# Altium PCB Top_PCB.PcbDoc
Units mm, origin at the board's own origin, x right, y up, seen from the top; angles counter-clockwise.
Board outline 56 x 85 mm, 2 copper layers (Top Layer, Bottom Layer); 33 components, 48 nets, 119 pads, 13 vias.
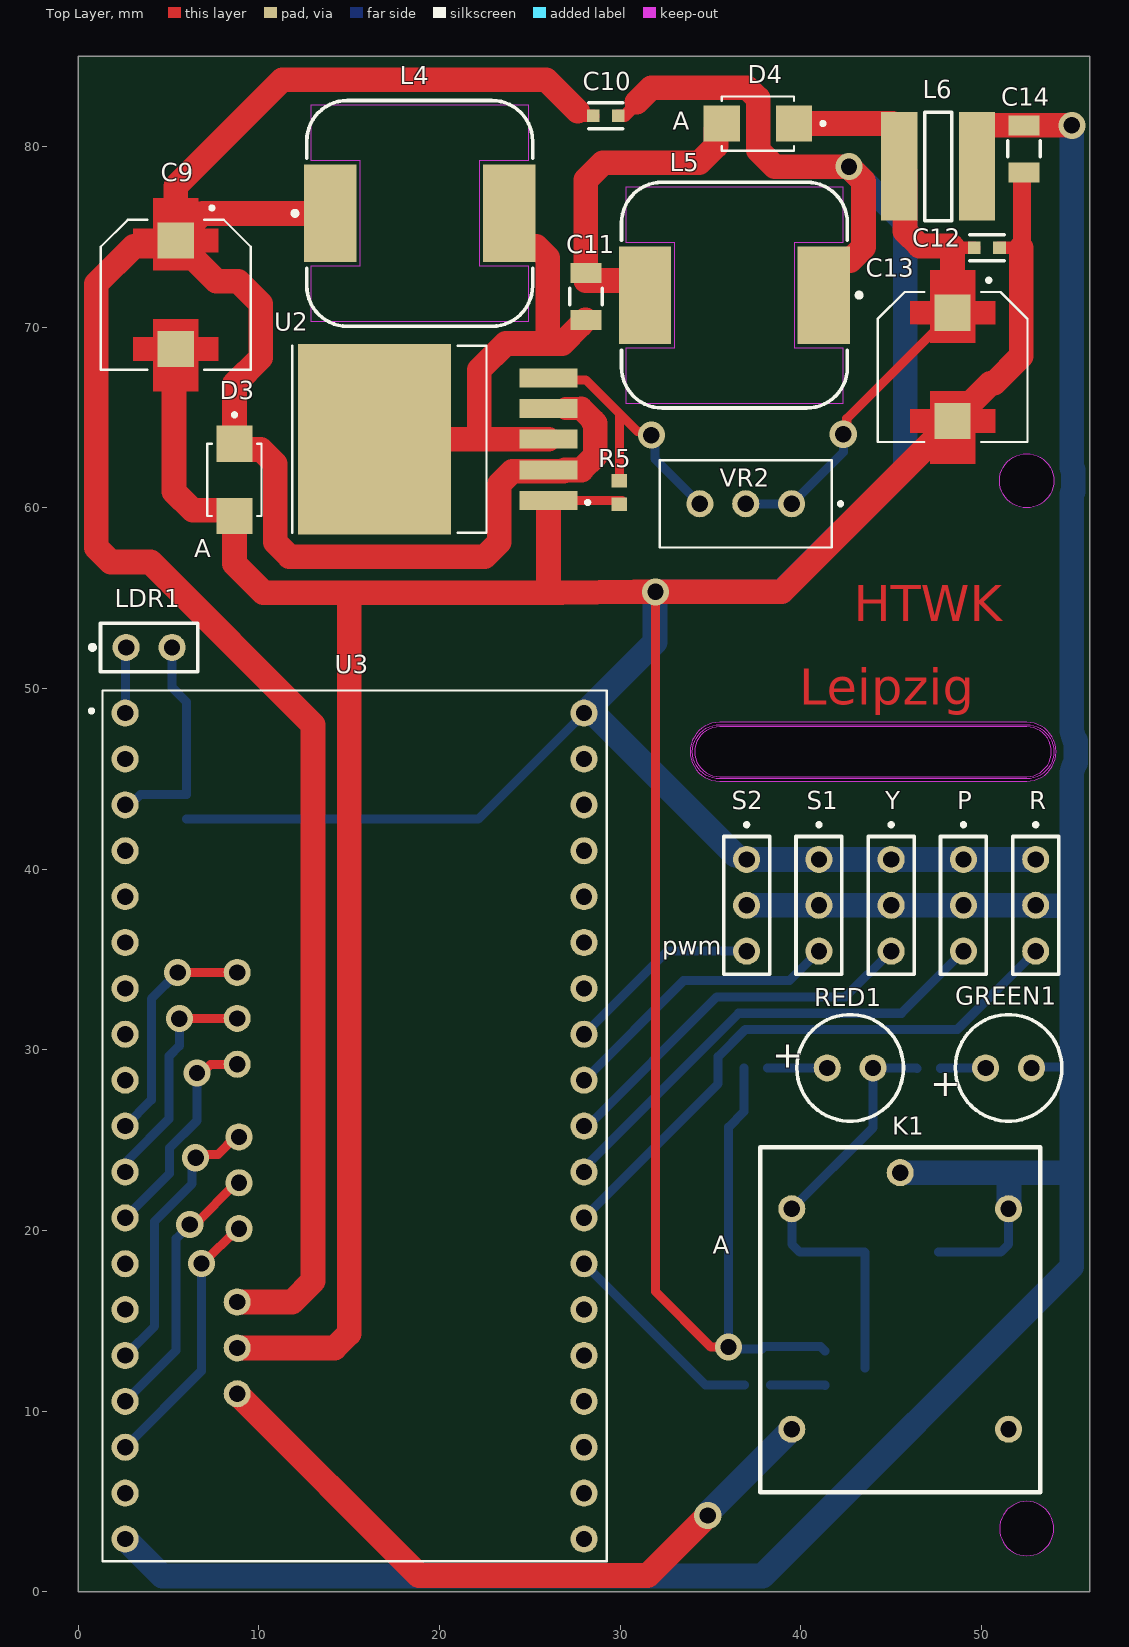
[diagram p0: Top Layer view]
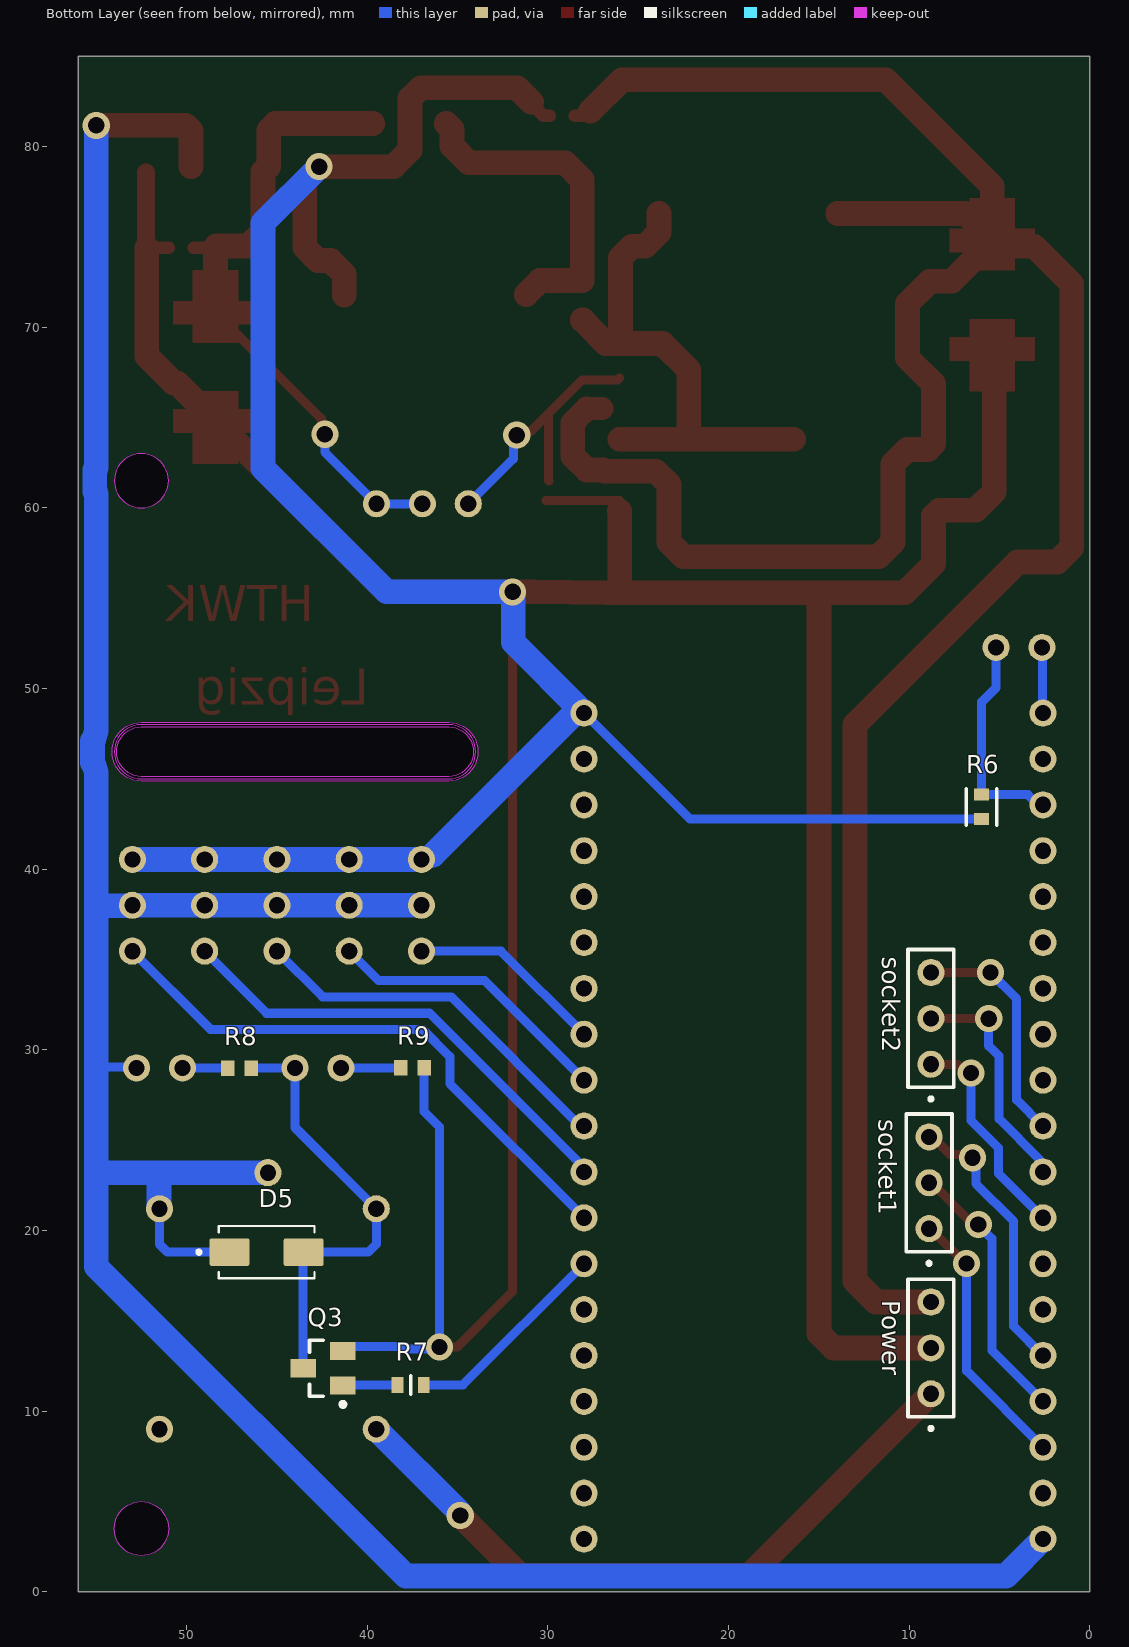
[diagram p1: Bottom Layer view, seen from below]
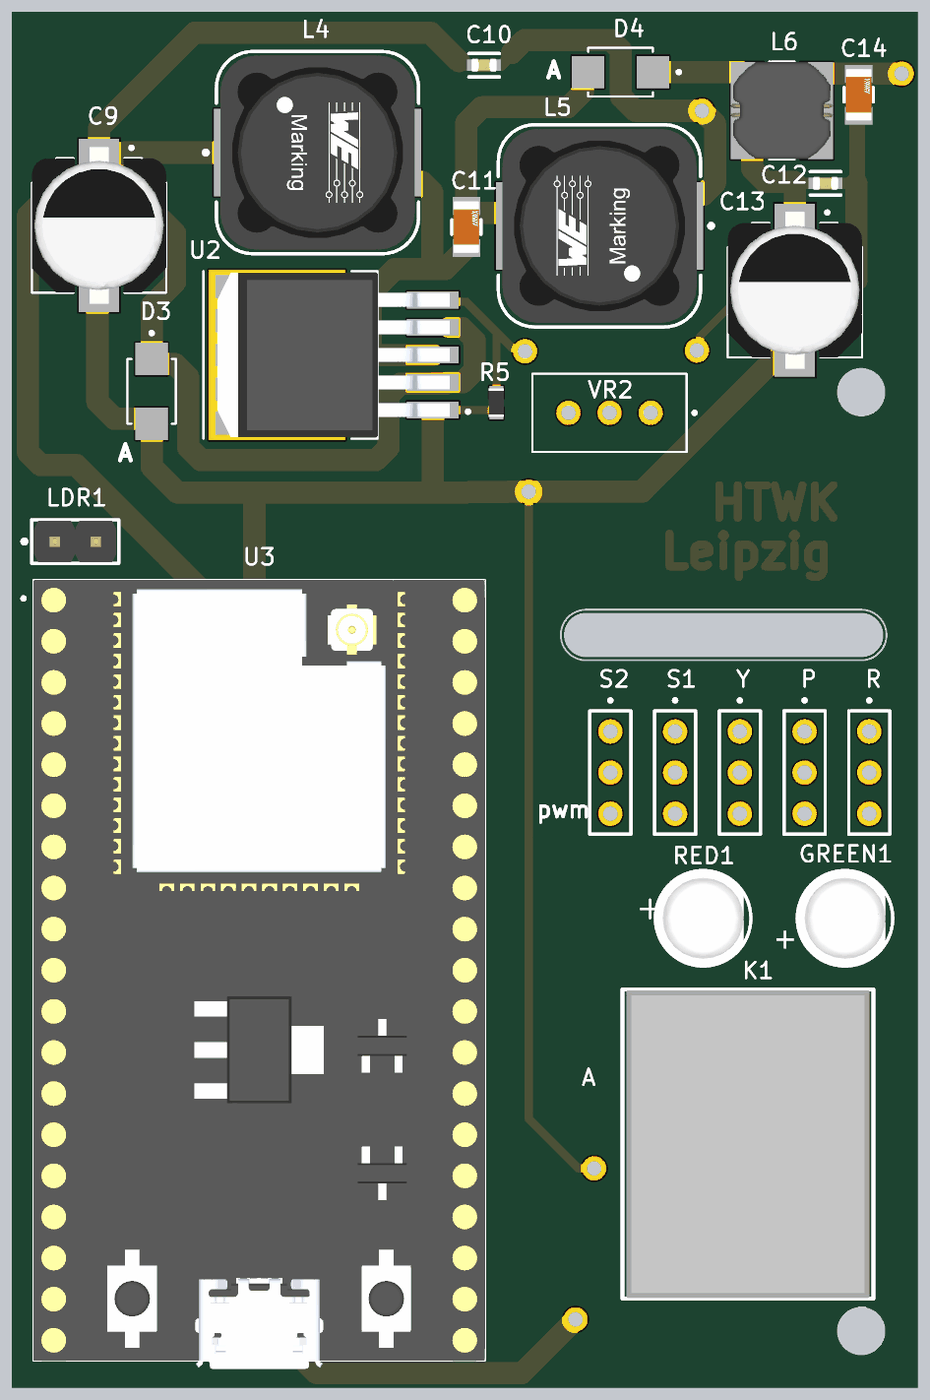
[diagram p2: 3D render of the assembled board from above, using the file's embedded part models]
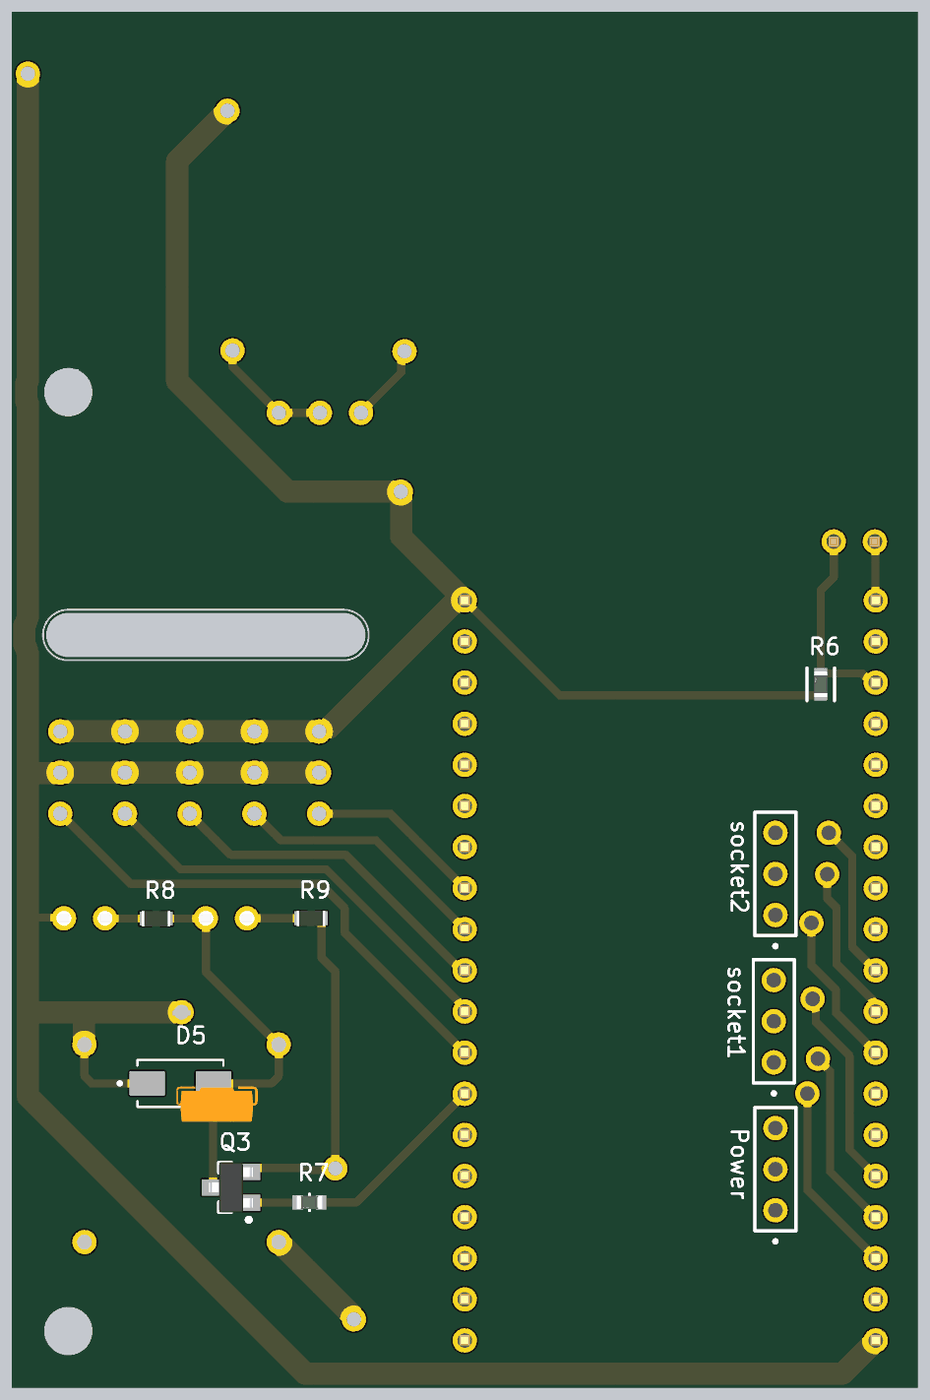
[diagram p3: 3D render of the assembled board from below, using the file's embedded part models]

## Layer stack, top to bottom
Top Solder: solder mask 0.0102, Solder Resist, Dk 3.5
Top Layer: signal copper 0.0356
Dielectric 1: dielectric 0.32, FR-4, Dk 4.8
Bottom Layer: signal copper 0.0356
Bottom Solder: solder mask 0.0102, Solder Resist, Dk 3.5

## Board outline
0,0 56,0 56,85 0,85
cut-out: 35.5,45.127 52.5,45.127 ccw(c52.5,46.5) 53.873,46.5 ccw(c52.5,46.5) 52.5,47.873 35.5,47.873 ccw(c35.5,46.5) 34.127,46.5 ccw(c35.5,46.5)
cut-out: 35.5,44.873 52.5,44.873 ccw(c52.5,46.5) 54.127,46.5 ccw(c52.5,46.5) 52.5,48.127 35.5,48.127 ccw(c35.5,46.5) 33.873,46.5 ccw(c35.5,46.5)
cut-out: 35.5,45 cw(c35.5,46.5) 34,46.5 cw(c35.5,46.5) 35.5,48 52.5,48 cw(c52.5,46.5) 54,46.5 cw(c52.5,46.5) 52.5,45
cut-out: 51,3.5 ccw(c52.5,3.5) 52.5,2 ccw(c52.5,3.5) 54,3.5 ccw(c52.5,3.5) 52.5,5 ccw(c52.5,3.5)
cut-out: 52.5,60 cw(c52.5,61.5) 51,61.5 cw(c52.5,61.5) 52.5,63 cw(c52.5,61.5) 54,61.5 cw(c52.5,61.5)

## Design rules (kind name [scope] priority, off if disabled: settings)
Clearance [All] p1: gap=0.3 ignorepadtopadclearanceinfootprint=FALSE
HoleSize [All] p1: absolutevalues=TRUE maxlimit=0.9 minlimit=0.9 maxpercent=80.000 minpercent=20.000
MinimumSolderMaskSliver [All] p1: minsoldermaskwidth=0.15
PolygonConnect PolygonConnect_2 [All vs IsNamedPolygon('GND_Top')] p1: connectstyle=Relief reliefconductorwidth=0.254 reliefentries=4 polygonreliefangle="90 Angle" airgapwidth=0.254
PolygonConnect PolygonConnect_1 [All vs IsNamedPolygon('GND_Top')] p2: thpad.connectstyle=Relief thpad.reliefconductorwidth=0.254 thpad.reliefentries=4 thpad.polygonreliefangle="90 Angle" thpad.airgapwidth=0.254 smdpad.connectstyle=Relief smdpad.reliefconductorwidth=0.254 smdpad.reliefentries=4 smdpad.polygonreliefangle="90 Angle" smdpad.airgapwidth=0.5 via.connectstyle=Relief via.reliefconductorwidth=0.254 via.reliefentries=4 via.polygonreliefangle="90 Angle" via.airgapwidth=0.254
PolygonConnect [All] p3: connectstyle=Relief reliefconductorwidth=0.254 reliefentries=4 polygonreliefangle="90 Angle" airgapwidth=0.254
RoutingVias [All] p1: holewidth=0.9 width=1.5 viastyle="Through Hole" minholewidth=0.9 minwidth=1.5 maxholewidth=0.9 maxwidth=1.5
SilkToSolderMaskClearance [IsPad] p1: minsilkscreentomaskgap=0.01 clearancetoexposedcopper=TRUE
SolderMaskExpansion [All] p1: expansion=0.102 istentingtop=FALSE
SupplyNets "Schematic Supply Nets" [InNet('GND')] p1: voltage=0.000
Width [All] p1: maxlimit=2 minlimit=0.5 preferedwidth=1.37
27 further rules are at their usual default settings.

## Classes and differential pairs
component class Top: C9 C10 C11 C12 C13 C14 D3 D4 D5 GREEN1 K1 L4 L5 L6 LDR1 P Q3 R R5 R6 R7 R8 R9 RED1 S1 S2 U2 U3 VR2 Y

## Components (designator, comment, footprint, x,y, rotation, side; value= is the part's Value field where it differs from the comment)
C9 "220uF" CAP_EEETC1V221UV 5.4,71.8 r270 top
C10 "100nF" FP-CGA3E-0_3-0_1-MFG 29.2,81.7 r180 top
C11 "22uF" FP-1206-L_3_2_0_2-W_1_6_0-IPC_C 28.1,71.7 r90 top
C12 "100nF" FP-CGA3E-0_3-0_1-MFG 50.3,74.4 r180 top
C13 "220uF" CAP_EEETC1V221UV 48.4,67.8 r270 top
C14 "10uF" FP-1206-L_3_2_0_2-W_1_6_0-IPC_C 52.35,79.875 r90 top
D3 "SS34" DIO_SS34 8.65,61.55 r270 top
D4 "SS34" DIO_SS34 37.625,81.275 r180 top
D5 "M7" DIOM505270X240 45.575,18.8 r180 bottom
GREEN1 "" KING-WP7113SGD_V 51.5,29 r0 top
K1 "SRD-05VDC-SL-C" SRD 45.5,23.2 r270 top
L4 "470" WE-PD_1280 18.9,76.3 r270 top
L5 "470" WE-PD_1280 36.325,71.775 r90 top
L6 "2R2" BOUR-SRN6045_V 47.6,78.9 r0 top
LDR1 "61300211121" 61300211121 3.925,52.275 r0 top
P "TSW-103-05-G-S-LL" SAMTEC_TSW-103-05-G-S-LL 49,40.54 r270 top
Power "TSW-103-05-G-S-LL" SAMTEC_TSW-103-05-G-S-LL 8.8,10.96 r90 bottom
Q3 "" FAIR-SOT23-3_V 42.45,12.375 r0 bottom
R "TSW-103-05-G-S-LL" SAMTEC_TSW-103-05-G-S-LL 53,40.54 r270 top
R5 "330" RESC1608X55X30LL15T15 29.95,60.85 r90 top
R6 "10K" FP-RC0603-0_55-IPC_C 6,43.45 r90 bottom
R7 "1K" FP-ERA3A-MFG 37.6,11.45 r0 bottom
R8 "330" RESC1608X55X30LL15T15 47.075,28.975 r0 bottom
R9 "330" RESC1608X55X30LL15T15 37.5,29 r0 bottom
RED1 "" KING-WP7113SRDD_V 42.73,29 r0 top
S1 "TSW-103-05-G-S-LL" SAMTEC_TSW-103-05-G-S-LL 41,40.54 r270 top
S2 "TSW-103-05-G-S-LL" SAMTEC_TSW-103-05-G-S-LL 37,40.54 r270 top
socket1 "TSW-103-05-G-S-LL" SAMTEC_TSW-103-05-G-S-LL 8.9,20.1 r90 bottom
socket2 "TSW-103-05-G-S-LL" SAMTEC_TSW-103-05-G-S-LL 8.8,29.2 r90 bottom
U2 "XL6009" DPAK170P1435X465-6N 19.9,63.8 r180 top
U3 "ESP32-DEVKITC-32U" MODULE_ESP32-DEVKITC-32U 15.3,25.79 r0 top
VR2 "10K" TRIM_3296W1103LF 36.95,60.225 r180 top
Y "TSW-103-05-G-S-LL" SAMTEC_TSW-103-05-G-S-LL 45,40.54 r270 top

## Footprints (in the part's own frame and the unit in brackets; to place one, negate y for a bottom-side part, rotate by r counter-clockwise, add the part's x,y. Pads: shape width x height; smd on the part's side, far side on the other; paste and mask are expansions set on the pad)
61300211121 [mm] "Pin Header, pitch 2.54 mm, THT, Vertical, single row, 2p"
  round 1.5 hole 0.9: 1(-1.27,0) 2(1.27,0)
  silkscreen extent -3.26,-1.35 2.69,1.34, body extent -2.54,-1.27 2.54,1.27, height 8.57
BOUR-SRN6045_V [mm] "SMD, 2-Leads, Body 6x6mm"
  rect 2x6 smd: 1(-2.15,0) 2(2.15,0)
  silkscreen extent -0.75,-3 0.75,3, body extent -3.15,-3 3.15,3, height 4.5
CAP_EEETC1V221UV [mm]
  rect 2x2 smd paste-2 mask+0: 1(-3,0) 2(3,0)
  Top Layer region: -2.35,1.25 -1.35,1.25 -1.35,-1.25 -2.35,-1.25 -2.35,-2.35 -3.65,-2.35 -3.65,-1.25 -5.35,-1.25 -5.35,1.25 -3.65,1.25 -3.65,2.35 -2.35,2.35
  Top Layer region: 3.65,1.25 5.35,1.25 5.35,-1.25 3.65,-1.25 3.65,-2.35 2.35,-2.35 2.35,-1.25 1.35,-1.25 1.35,1.25 2.35,1.25 2.35,2.35 3.65,2.35
  silkscreen extent -4.9,-4.15 4.15,4.15, body extent -4.85,-4.15 4.85,4.15, height 10.5
DIO_SS34 [mm]
  rect 2x2 smd: A(2,0) C(-2,0)
  silkscreen extent -3.7,-1.5 2,1.5, body extent -2,-1.52 2,1.52, height 0.25
DIOM505270X240 [mm]
  rrect15% 2.21x1.53 smd: A(2.05,0) C(-2.05,0)
  silkscreen extent -3.85,-1.45 2.65,1.45, body extent -0.28,-2.37 4.77,-0.2, height 2.45
DPAK170P1435X465-6N [mm]
  rect 3.21x1.05 smd: 1(-6.13,3.4) 2(-6.13,1.7) 3(-6.13,0) 4(-6.13,-1.7) 5(-6.13,-3.4)
  rect 8.46x10.53 smd paste-6: 6(3.5,0)
  silkscreen extent -8.4,-5.18 8.05,5.18, body extent -7.17,-5.08 7.17,5.08, height 4.65
FAIR-SOT23-3_V [mm] "SOT23, 3-Leads, Body 3.12x1.5mm, Pitch 0.95mm"
  rect 1.4x1 smd: 1(-1.1,0.95) 2(-1.1,-0.95) 3(1.1,0)
  silkscreen extent -1.22,-1.55 0.75,2.12, body extent -1.35,-1.56 1.35,1.56, height 1.2
FP-1206-L_3_2_0_2-W_1_6_0-IPC_C [mm]
  rect 1.105x1.706 smd paste+0 mask+0: 1(-1.301,0) 2(1.301,0)
  silkscreen extent -0.45,-0.9 0.45,0.9, body extent -1.95,-1 1.95,1, height 0.25
FP-CGA3E-0_3-0_1-MFG [mm]
  rect 0.7x0.7 smd paste+0 mask+0: 1(-0.7,0) 2(0.7,0)
  silkscreen extent -0.95,-0.72 0.95,0.72, body extent -1.15,-0.65 1.15,0.65, height 0.25
FP-ERA3A-MFG [mm]
  rect 0.65x0.9 smd paste+0 mask+0: 1(-0.725,0) 2(0.725,0)
  silkscreen extent 0,-0.5 0,0.5, body extent -0.8,-0.4 0.8,0.4, height 0.55
FP-RC0603-0_55-IPC_C [mm]
  rect 0.659x0.812 smd paste+0 mask+0: 1(-0.677,0) 2(0.677,0)
  silkscreen extent -1.01,-0.85 1.01,0.85, body extent -0.8,-0.4 0.8,0.4, height 0.55
KING-WP7113SGD_V [mm] "THD, 2-Leads, Dia 5.9mm, Body Length 8.6mm"
  round 1.5 hole 0.9: 1(-1.27,0) 2(1.27,0)
  silkscreen extent -2.95,-2.95 2.95,2.95, body extent -2.95,-2.95 2.5,2.95, height 15.5
KING-WP7113SRDD_V [mm] "THD, 2-Leads, Dia 5.9mm, Body Length 8.6mm"
  round 1.5 hole 0.9: 1(-1.27,0) 2(1.27,0)
  silkscreen extent -2.95,-2.95 2.95,2.95, body extent -2.95,-2.95 2.5,2.95, height 15.5
MODULE_ESP32-DEVKITC-32U [mm]
  round 1.5 hole 0.9: 1(-12.7,22.85) 2(-12.7,20.31) 3(-12.7,17.77) 4(-12.7,15.23) 5(-12.7,12.69) 6(-12.7,10.15) 7(-12.7,7.61) 8(-12.7,5.07) 9(-12.7,2.53) 10(-12.7,-0.01) 11(-12.7,-2.55) 12(-12.7,-5.09) 13(-12.7,-7.63) 14(-12.7,-10.17) 15(-12.7,-12.71) 16(-12.7,-15.25) 17(-12.7,-17.79) 18(-12.7,-20.33) 19(-12.7,-22.87) 20(12.7,-22.87) 21(12.7,-20.33) 22(12.7,-17.79) 23(12.7,-15.25) 24(12.7,-12.71) 25(12.7,-10.17) 26(12.7,-7.63) 27(12.7,-5.09) 28(12.7,-2.55) 29(12.7,-0.01) 30(12.7,2.53) 31(12.7,5.07) 32(12.7,7.61) 33(12.7,10.15) 34(12.7,12.69) 35(12.7,15.23) 36(12.7,17.77) 37(12.7,20.31) 38(12.7,22.85)
  silkscreen extent -14.67,-24.1 13.95,24.1, body extent -13.95,-24.62 13.95,24.13, height 7.85
RESC1608X55X30LL15T15 [mm] "Chip Resistor, 2-Leads, Body 1.75x0.95mm, IPC High Density"
  rect 0.75x0.85 smd: 1(-0.65,0) 2(0.65,0)
  body extent -0.87,-0.48 0.87,0.48, height 0.55
SAMTEC_TSW-103-05-G-S-LL [mm]
  round 1.5 hole 0.9: 01(0,0) 02(2.54,0) 03(5.08,0)
  silkscreen extent -2.02,-1.27 6.35,1.27
SRD [mm]
  round 1.5 hole 0.9: 1(0,0) 2(2,6) 3(2,-6) 4(14.2,6) 5(14.2,-6)
  silkscreen extent -1.4,-7.75 17.7,7.75, body extent -1.35,-7.5 17.65,7.5, height 15.04
TRIM_3296W1103LF [mm]
  round 1.5 hole 0.9: 1(-2.54,0) 2(0,0) 3(2.54,0)
  silkscreen extent -5.35,-2.41 4.76,2.42
WE-PD_1280 [mm] "SMT Shielded Power Inductor, 2-leads, body 12x12mm"
  rect 5.4x2.9 smd: 1(0,-4.95) 2(0,4.95)
  Top Layer keep-out region: -6,6 -2.9,6 -2.9,3.3 2.9,3.3 2.9,6 6,6 6,-6 2.9,-6 2.9,-3.3 -2.9,-3.3 -2.9,-6 -6,-6
  silkscreen extent -6.25,-7.02 6.25,6.25, body extent -6,-6 6,6, height 7.51

## Part data
C9 C13: library part EEETC1V221UV, "CAP ALUM 220UF 20% 35V SMD", Package="RADIAL-2 Panasonic", Availability="In Stock", Check_prices=https://www.snapeda.com/parts/EEE-TC1V221UV/Panasonic/view-part/6178608/?ref=eda, MF="Panasonic Electronic Components", MP=EEE-TC1V221UV, Price=None, Purchase-URL=https://pricing.snapeda.com/search/part/EEE-TC1V221UV/?ref=eda, SnapEDA_Link=https://www.snapeda.com/parts/EEE-TC1V221UV/Panasonic/view-part/6178608/?ref=snap
C10 C12: library part CMP-2000-07546-2, "Cap Ceramic 100nF 50V X7R 10% Pad SMD 0603 +125°C Automotive T/R", Case Code (Imperial)=0603, Case Code (Metric)=1608, Dielectric=X7R, Max Operating Temperature=125°C, Min Operating Temperature=-55°C, Package Quantity=1, Ratings=AEC-Q200, Tolerance=10%, Voltage=50V, Capacitance=100nF, Case/Package=0603, Composition=Ceramic, Depth=0.8mm, Height=0.8mm, Lead Free="Lead Free", Length=1.6mm, Mount="Surface Mount", Packaging="Tape and Reel", Radiation Hardening=No, REACH SVHC="No SVHC", Termination=SMD/SMT, Thickness=0.035inch, Voltage Rating=50V, Voltage Rating (DC)=50V, Weight=7.1E-05oz, Width=0.8mm
C11: library part CMP-1037-04985-3, "CAP CER 22UF 6.3V X7R 1206", Case Code (Imperial)=1206, Case Code (Metric)=3216, Dielectric=X7R, Max Operating Temperature=125°C, Min Operating Temperature=-55°C, Package Quantity=2500, Tolerance=10%, Voltage=6.3V, Capacitance=22uF, Case/Package=1206, Construction=Flat, Contact Plating=Tin, Depth=1.6mm, Dissipation Factor=5%, Height=1.78mm, Lead Free="Lead Free", Length=3.2mm, Mount="Surface Mount", Number of Pins=2, Packaging="Tape and Reel", Radiation Hardening=No, REACH SVHC="No SVHC", RoHS Compliant=Yes, Series=FlEXITERM, Termination=SMD/SMT, Thickness=0.07inch, Voltage Rating=6.3V, Voltage Rating (DC)=6.3V, Width=1.6mm
C14: library part CMP-04427-020964-1, "General Purpose Ceramic Capacitor, 1206, 10uF, 10%, X5R, 15%, 6.3V", Case Code (Imperial)=1206, Case Code (Metric)=3216, Dielectric=X5R, Insulation Resistance=100GR, Max Operating Temperature=85°C, Min Operating Temperature=-55°C, Package Quantity=1, Tolerance=10%, Voltage=6.3V, Capacitance=10uF, Case/Package=1206, Construction=Flat, Depth=1.6mm, Dissipation Factor=5%, Height=0.07mm, Lead Free="Lead Free", Length=3.2mm, Mount="Surface Mount", Number of Pins=2, Packaging="Tape and Reel", Radiation Hardening=No, REACH SVHC="No SVHC", RoHS Compliant=Yes, Series=-, Size=1.78mm, Termination=SMD/SMT, Thickness=0.07inch, Voltage Rating=6.3V, Voltage Rating (DC)=6.3V, Weight=0.000571oz, Width=1.6mm
D3 D4: library part CMP-004-00031-2, "3A, 40V, Schottky Rectifier", Case/Package="DO-214AB-2 Taiwan Semiconductor", Check_prices=https://www.snapeda.com/parts/SS34/Taiwan+Semiconductor/view-part/?ref=eda, Component Type=Standard, Design Item ID=SS34, MF="Taiwan Semiconductor", MP=SS34, Pins=2, SnapEDA_Link=https://www.snapeda.com/parts/SS34/Taiwan+Semiconductor/view-part/?ref=snap, Source=SS34.SchLib
D5: "Diode, SMA, 1000V, 1A, 150°C", Package="DO-214AC Diotec", Check_prices=https://www.snapeda.com/parts/M7/Diotec/view-part/?ref=eda, MF="Diotec Semiconductor", MP=M7, SnapEDA_Link=https://www.snapeda.com/parts/M7/Diotec/view-part/?ref=snap
GREEN1: library part CMP-007-00010-2, "LED Green, 62.5 mW, 25 mA, -40 to 85 degC, 2-Pin THD, RoHS, Bulk", Case/Package=Radial, Colour=Green, Forward Voltage=2.2V, Manufacturer=Kingbright, Package Description="2-Pin Through Hole Device, Dia 5.9 mm, Body Length 8.6 mm", Package Quantity=1000, Package Reference=WP7113SGD, Power=62.5mW, Datasheet URL=http://www.kingbrightusa.com/images/catalog/SPEC/WP7113SGD.pdf, Datasheet Version="Rev. 6B, 01/2015", Illumination Colour=Green, Lens Style=Dome, Luminous Intensity=40mcd, Mounting Technology=TH, Nominal Vf=2.2V, Packaging=Bulk, RoHS Compliant=True, Viewing Angle=30degrees
K1: "Relay or Contactor", Manufacturer_Name="Songle Relay", Datasheet Link=http://files.microjpm.webnode.com/200001010-dda41de9e1/Songle%20Relay%20Datasheet.pdf, Manufacturer_Part_Number=SRD-05VDC-SL-C
L4 L5: library part CMP-0227-00205-2, Ambient Temperature Range High=85°C, Ambient Temperature Range Low=-40°C, Case/Package=Nonstandard, Current Rating=3A, DC Resistance (DCR)=53mΩ, Inductance=47µH, Inductance Tolerance=20%, Max DC Current=2.7A, Max Operating Temperature=125°C, Resistance=100mΩ, Self Resonant Frequency=7.9MHz, Test Frequency=1kHz, Composition=Wirewound, Core Material=Ferrite, Depth=12mm, Height=8mm, Height - Seated (Max)=8.001mm, Lead Free="Lead Free", Lead Pitch=7mm, Length=12mm, Min Operating Temperature=-40°C, Mount="Surface Mount", NexarPartId=8917149, Number of Pins=2, Packaging="Cut Tape (CT)", REACH SVHC=Unknown, RMS Current (Irms)=2.7A, RoHS=Compliant, Saturation Current=3A, Series Resistance=100mΩ, Shielding=Shielded, Termination=SMD/SMT, Tolerance=20%, Weight=4.535924g, Width=12mm
L6: library part CMP-2000-07142-1, "Semi-Shielded Power Inductor, 2.2 uH, +/- 30%, 3.5 A, -40 to 125 degC, 2-Pin SMD, RoHS, Tape and Reel", Current - Saturation=6A, Current Rating=3.5A, DC Resistance (DCR)=25.1mOhmMax, Frequency - Self Resonant=35MHz, Frequency - Test=100kHz, Inductance=2.2µH, Manufacturer=Bourns, Operating Temperature=-40°C~125°C, Package / Case=Nonstandard, Package Description="2-Pin Surface Mounted Device, Body 6 x 6 mm", Package Reference=SRN6045, Q @ Freq=15@7.96MHz, Standard Package=1, Tolerance=±30%, 3D Model=SRN6045.stp, Category=Inductors,Coils,Chokes, Datasheet URL=http://www.bourns.com/docs/Product-Datasheets/SRN6045.pdf, Datasheet Version=12/2014, EDA / CAD Models=DownloadfromAcceleratedDesigns, Family=FixedInductors, Height - Seated (Max)="0.177\"(4.50mm)", Kits="SRN-LAB1-ND / -INDUCTORKIT", Manufacturer URL=http://www.bourns.com/, Material - Core=Ferrite, Mounting Technology=SurfaceMount, Mounting Type=SurfaceMount, Online Catalog=SRNSeries, Other Names=SRN6045-2R2YCT, Packaging=CutTape(CT), PCN Assembly/Origin=MagneticproductsOct/2013, Product Training Modules=SRNSeries:Semi-ShieldedInductors, RoHS Information=SRN6045SeriesMaterialDeclaration, Series=SRN6045, Shielding=Shielded, Size / Dimension="0.236\"Lx0.236\"W(6.00mmx6.00mm)", Type=Wirewound
LDR1: library part CMP-1712-00002-6, Color=Black, Contact Resistance=20mΩ, Current Rating=3A, Max Operating Temperature=125°C, Min Operating Temperature=-40°C, Operating Supply Voltage=250V, Connector Type="Male Pin", Contact Gender=Male, Contact Material=Copper, Contact Mating Length=5.9944mm, Contact Plating=Gold, Gender=Male, Height=8.94mm, Housing Material=PBT, Lead Free="Lead Free", Lead Pitch=2.54mm, Mount="Through Hole", NexarPartId=20081794, Number of Contacts=2, Number of Pins=2, Number of Positions=2, Number of Rows=1, Orientation=Vertical, Packaging=Bulk, Pitch=2.54mm, REACH SVHC="No SVHC", RoHS=Compliant, Termination="Through Hole", Voltage Rating=250V
P Power R S1 S2 socket1 socket2 Y: Package=None, Availability=Unavailable, MP=TSW-103-05-G-S-LL, Price=None
Q3: library part CMP-1670-00008-1, "NPN General Purpose Amplifier, 40 V, 0.2 A, -55 to 150 degC, 3-Pin SOT23, RoHS, Tape and Reel", Capacitance="1.8E-11 f", Frequency="12.288 MHz", Frequency Tolerance=30ppm, Load Capacitance="18 pF", Max Operating Temperature=70degC, Min Operating Temperature=-20degC, Package Quantity=1000, ComponentLink1Description="Manufacturer URL", ComponentLink1URL=https://www.fairchildsemi.com/, ComponentLink2Description=Datasheet, ComponentLink2URL=https://www.fairchildsemi.com/datasheets/MM/MMBT3904.pdf, ComponentLink3Description="Package Specification", ComponentLink3URL=http://www.fairchildsemi.com/dwg/MA/MA03D.pdf, DatasheetVersion="Rev. 1.1.0, 10/2014", ESR="40 Ohm", Height="0.041 inch", Length="0.197 inch", Mount="Surface Mount", PackageDescription="3-Pin Small Outline Transistor, Body 2.92 x 1.325 mm, Pitch 0.95 mm", PackageReference=SOT23-3, Packaging="Tape and Reel", Pins=4, REACH SVHC="No SVHC", RoHSCompliant=True, Tolerance=30ppm, Width="0.126 inch"
R5 R8 R9: library part CMP-2000-00435-2, "Chip Resistor, 330 Ohm, +/- 1%, 0.1 W, -55 to 155 degC, 0603 (1608 Metric), RoHS, Tape and Reel", Current Rating="500 mA", Max Operating Temperature="85 degC", Min Operating Temperature="-25 degC", Package Quantity=1500, Voltage Rating="10 V", ComponentLink1Description="Manufacturer URL", ComponentLink1URL=http://www.panasonic.com/, ComponentLink2Description=Datasheet, ComponentLink2URL=http://industrial.panasonic.com/cdbs/www-data/pdf/RDA0000/AOA0000C86.pdf, Contact Finish=Gold, Contact Material=Copper, Contact Plating=Gold, DatasheetVersion=Apr-15, Gender=Male, Height="1.45 mm", Lead Pitch="1.1 mm", Length="13.7 mm", Mating Cycles=10000, Mount="Surface Mount", PackageDescription="2-Pin Surface Mount Device, Body 1.6 x 0.85 mm", PackageReference=0603, Packaging="Tape and Reel", Pins=8, REACH SVHC="No SVHC", RoHSCompliant=true, Width="1.45 mm"
R6: library part CMP-2100-03664-2, "RES 10K OHM 1% 1/10W 0603", Case Code (Imperial)=0603, Case Code (Metric)=1608, Max Operating Temperature=155°C, Max Power Dissipation=100mW, Min Operating Temperature=-55°C, Resistance=10kR, Resistance Tolerance=1%, Resistor Type="Thick Film", Temperature Coefficient=100ppm/°C, Voltage Rating=75V, Voltage Rating (DC)=50V, Case/Package=0603, Construction=Rectangular, Depth=0.8mm, Features="Moisture Resistant", Height=0.45mm, Lead Free="Lead Free", Lead Pitch=0.3mm, Length=1.6mm, Military Standard=Not, Number of Pins=2, Number of Terminations=2, Packaging="Tape and Reel", Power Rating=100mW, RoHS Compliant=Yes, Series=RC, Size Code=0603, Termination=SMD/SMT, Tolerance=1%, Weight=7.1E-05oz, Width=0.8mm
R7: library part CMP-2000-00873-2, "RES SMD 1K OHM 0.1% 1/10W 0603", Case Code (Imperial)=0603, Case Code (Metric)=1608, Max Operating Temperature=155°C, Max Power Dissipation=100mW, Min Operating Temperature=-55°C, Package Quantity=5000, Resistance=1kR, Resistance Tolerance=0.1%, Resistor Type="Thin Film", Temperature Coefficient=25ppm/°C, Voltage Rating=75V, Case/Package=0603, Construction=Rectangular, Contact Plating=Tin, Depth=0.8mm, Height=0.45mm, Length=1.6mm, Military Standard=Not, Mount="Surface Mount", Number of Pins=2, Number of Terminations=2, Packaging="Tape and Reel", Power Rating=100mW, Radiation Hardening=No, REACH SVHC="No SVHC", RoHS Compliant=Yes, Series=ERA-3A, Size Code=0603, Technology="METAL FILM", Termination=SMD/SMT, Tolerance=0.1%, Width=0.8mm
RED1: library part CMP-007-00033-2, "The Super Bright Red Source Color Device, 1.85 V, -40 to 85 degC, 2-Pin THD, RoHS, Tape and Reel", Case/Package=Radial, Colour=Red, Forward Voltage=1.85V, Manufacturer=Kingbright, Package Description="2-Pin Through Hole Device, Dia 5.9 mm, Body Length 8.6 mm", Package Quantity=500, Package Reference=WP7113SRDD, Datasheet URL=http://www.kingbrightusa.com/images/catalog/SPEC/WP7113SRD-D.pdf, Datasheet Version="Rev. 6A, 07/2016", Illumination Colour=Red, Lens Style=Diffused, Luminous Intensity=300mcd, Mounting Technology=TH, Nominal Vf=1.85V, Packaging=Bulk, RoHS Compliant=True, Viewing Angle=30degrees
U2: library part CMP-003-000000-1, "The XL6009 regulator is a wide input range, current mode, DC/DC converter which is capable of generating either positive or negative output voltages.", Package="TO-263-5L XLSEMI", Availability="Not in stock", Check_prices=https://www.snapeda.com/parts/XL6009/XLSEMI/view-part/?ref=eda, Component Type=Standard, Design Item ID=XL6009, MF=XLSEMI, MP=XL6009, Pin Count=6, Price=None, SnapEDA_Link=https://www.snapeda.com/parts/XL6009/XLSEMI/view-part/?ref=snap, Source=XL6009.SchLib
U3: "ESP32-WROOM-32UE series Transceiver; 802.11 b/g/n (Wi-Fi, WiFi, WLAN), Bluetooth® Smart Ready 4.x Dual Mode Evaluation Board", Package="CUSTOM-38 ESPRESSIF", Check_prices=https://www.snapeda.com/parts/ESP32-DEVKITC-32U/Espressif+Systems/view-part/?ref=eda, MF="Espressif Systems", MP=ESP32-DEVKITC-32U, SnapEDA_Link=https://www.snapeda.com/parts/ESP32-DEVKITC-32U/Espressif+Systems/view-part/?ref=snap
VR2: library part 3296W1103LF, "Trimmer, Potentiometer 10kohm 25turn Thd", Package=None, Availability=Unavailable, Check_prices=https://www.snapeda.com/parts/3296W1103LF/Bourns/view-part/2487625/?ref=eda, MF=Bourns, MP=3296W1103LF, Price=None, SnapEDA_Link=https://www.snapeda.com/parts/3296W1103LF/Bourns/view-part/2487625/?ref=snap

## Via types
v1: diameter 1.5, hole 0.9, Top Layer to Bottom Layer, 13 vias

## Nets (pads, with @x,y where several pads share a name; then routed paths per layer and width w, separated by ;. In a path a pad name is that pad's centre, name@x,y a point inside that pad or via, vN(x,y) a via of type N, cw(c..) or ccw(c..) an arc to the next point about the centre after c; other vN are vias at no path point)
GND: C9.2 C10.1 C12.1 C13.2 C14.1 D3.A L5.1 P.01 Power.02 Q3.2 R5.1 R6.1 R9.1 R.01 S1.01 S2.01 U2.1 U3.38 Y.01 | length 317.4
  Top Layer w0.5: U2.1@26.05,60.4 R5.1@30.1,60.4 ; v1(31.95,55.35) 31.95,16.625 35.025,13.55 v1(36,13.55)
  Top Layer w0.7: C10.1 30.25,81.7 30.913,82.363 ; C12.1 52.2,74.4
  Top Layer w1: 52.25,74.57 C14.1@52.25,78.574
  Top Layer w1.37: C9.2 5.3,68.7 5.3,60.9 6.335,59.865 8.335,59.865 D3.A 8.65,56.905 10.255,55.3 15,55.3 ; Power.02 14.197,13.5 15,14.303 15,55.3 ; 26.05,59.825 26.03,59.805 26.03,55.3 ; 30.913,82.457 31.715,83.26 37.033,83.26 37.64,82.653 37.64,79.798 38.553,78.885 v1(42.662,78.885) 43.465,78.082 43.465,74.422 42.733,73.69 42.04,73.69 41.275,72.925 L5.1 ; 52.2,74.4 52.2,68.403 50.697,66.9 50.5,66.9 48.085,64.485 38.95,55.35 v1(31.95,55.35) 30.815,55.35 26.75,55.3 26.03,55.3 ; 15,55.3 26.03,55.3
  Bottom Layer w0.5: R6.1 22.133,42.773 U3.38 ; R9.1 36.85,26.575 36,25.725 v1(36,13.55) 36.112,13.438 37.862,13.438 ; 37.862,13.575 41.1,13.575 Q3.2
  Bottom Layer w1.37: S2.01@36.367,40.783 28.535,48.615 28.025,48.615 U3.38 31.925,52.565 31.925,55.325 v1(31.95,55.35) 38.925,55.35 45.775,62.2 45.775,75.772 v1(42.662,78.885) ; S2.01 S1.01 Y.01 P.01 R.01
NetB+1_1: 
NetB+1_2: 
NetB-1_1: 
NetC1_2: 
NetC3_1: 
NetC3_2: 
NetC4_2: 
NetC6_2: 
NetC7_1: 
NetC8_1: 
NetC9_1: C9.1 C10.2 D3.C L4.1 Power.03 U2.2 U2.4 | length 157.6
  Top Layer w0.5: 27.65,81.95 27.9,81.7
  Top Layer w0.7: 27.9,81.7 C10.2
  Top Layer w1.27: U2.4@27,65.503 27.84,65.503
  Top Layer w1.3: 27.84,65.503 28.526,64.816 28.526,64.767
  Top Layer w1.37: Power.03 11.84,16.04 13,17.2 13,48 4,57 1.803,57 1,57.803 1,72.397 3.088,74.485 5.085,74.485 C9.1 ; L4.1 6.9,76.3 C9.1 ; 27.65,81.95 25.9,83.7 11.3,83.7 5.4,77.8 C9.1 ; 28.526,64.767 28.62,64.673 28.62,62.867 27.853,62.1 26.95,62.1 26.88,62.03 24.032,62.03 23.3,61.297 23.3,58.103 22.497,57.3 11.703,57.3 10.9,58.103 10.9,62.432 10.097,63.235 8.965,63.235 D3.C 8.65,66.858 10.1,68.307 10.1,71.3 8.852,72.548 7.652,72.548 C9.1
NetC11_1: C11.1 L4.2 U2.3 U2.6 | length 28.3
  Top Layer w1.37: U2.6 U2.3 ; 22.2,64.1 22.2,67.638 23.662,69.1 25.647,69.1 ; L4.2 23.85,75.25 24.615,74.485 25.349,74.485 25.985,73.849 25.985,69.851 ; 25.85,69.303 25.647,69.1 ; C11.1 28.065,70.399 27.799,70.134 27.799,70.106 26.793,69.1 25.647,69.1
NetC11_2: C11.2 D4.A L5.2 | length 18.4
  Top Layer w1.37: L5.2@31.2,71.8 31.2,71.815 30.435,72.58 28.1,72.58 28.1,78.15 29.05,79.1 34.375,79.1 35.31,80.035 35.31,80.96 D4.A
NetC12_2: C12.2 C13.1 D4.C L6.1 VR2.1 VR2.2 | length 37.6
  Top Layer w0.5: v1(42.35,64.075) 42.541,64.266 42.541,64.941 C13.1 48.226,70.626 47.126,70.626 ; 48.341,74.5 48.441,74.4
  Top Layer w0.7: 48.441,74.4 C12.2
  Top Layer w1.37: D4.C@39.69,81.275 45.075,81.275 45.45,80.9 L6.1 45.765,78.585 45.765,75.31 46.575,74.5 48.341,74.5 ; C13.1 48.4,74.359 48.441,74.4
  Bottom Layer w0.5: VR2.2 VR2.1 42.35,63.085 v1(42.35,64.075)
NetC14_2: C14.2 D5.C GREEN1.2 K1.1 K1.2 L6.2 P.02 R.02 S1.02 S2.02 U3.19 Y.02 | length 168.7
  Top Layer w1.37: L6.2 49.75,80.861 50.065,81.176 C14.2 ; C14.2 v1@55,81.175
  Bottom Layer w0.5: D5.C 51.057,18.8 51.5,19.243 K1.2 ; GREEN1.2 52.82,29.05 55,29.05
  Bottom Layer w1.37: U3.19 4.645,0.875 37.875,0.875 55,18 55,29.05 55,37.9 ; S2.02 S1.02 Y.02 P.02 R.02 53.025,37.975 54.925,37.975 55,37.9 ; K1.1 51.7,23.2 ; K1.2 51.525,21.225 51.525,23.025 51.7,23.2 ; 54.775,23.2 51.7,23.2 ; v1(55,81.175) 55,62.219 55.026,62.156 55.085,62.097 55.085,60.903 55.026,60.844 55,60.781 55,47.641 55.108,47.291 55.15,47.172 55.212,47.11 55.212,45.89 55.137,45.779 55.108,45.709 55.027,45.453 55,45.359 55,37.9
NetD5_A: D5.A K1.3 Q3.3 R8.1 RED1.2 | length 24.7
  Bottom Layer w0.5: Q3.3 43.55,18.775 D5.A 39.95,18.8 39.5,19.25 K1.3 44,25.7 RED1.2 44.013,28.987 46.413,28.987 R8.1
NetGREEN1_1: GREEN1.1 R8.2 | length 2.5
  Bottom Layer w0.5: R8.2 47.737,28.987 50.217,28.987 GREEN1.1
NetIC1_1: 
NetIC1_2: 
NetIC1_3: 
NetK1_5: K1.5 Power.01 | length 38.3
  Top Layer w1.37: Power.01 18.86,0.9 31.525,0.9 v1(34.85,4.225)
  Bottom Layer w1.37: v1(34.85,4.225) 34.925,4.3 34.925,4.425 K1.5
NetLDR1_1: LDR1.1 U3.1 | length 3.7
  Bottom Layer w0.5: U3.1 2.628,48.668 2.628,52.247 LDR1.1
NetLDR1_2: LDR1.2 R6.2 U3.3 | length 12.1
  Bottom Layer w0.5: U3.3 2.871,43.56 3.437,44.127 R6.2 6,49.25 5.195,50.055 LDR1.2
NetP_03: P.03 U3.28 | length 26.2
  Bottom Layer w0.5: U3.28 28,23.473 36.552,32.025 45.565,32.025 P.03
NetPi1_4: 
NetPi1_8: 
NetPi1_10: 
NetPi1_16: 
NetPi1_18: 
NetPi1_22: 
NetPi1_36: 
NetQ1_2: 
NetQ3_1: Q3.1 R7.2 | length 3
  Bottom Layer w0.5: R7.2 38.338,11.438 41.337,11.438 Q3.1
NetR1_2: 
NetR5_2: R5.2 U2.5 VR2.3 | length 15.7
  Top Layer w0.5: U2.5 26.141,67.089 28.092,67.089 29.955,65.226 ; R5.2 29.955,61.505 29.955,65.226 ; v1(31.725,64.025) 31.534,64.216 30.964,64.216 29.955,65.226
  Bottom Layer w0.5: v1(31.725,64.025) 31.916,63.834 31.916,62.719 VR2.3
NetR7_1: R7.1 U3.26 | length 11.7
  Bottom Layer w0.5: U3.26 34.71,11.45 R7.1
NetR9_2: R9.2 RED1.1 | length 3.3
  Bottom Layer w0.5: R9.2 RED1.1
NetR_03: R.03 U3.27 | length 32
  Bottom Layer w0.5: U3.27 35.425,28.125 35.425,29.625 36.925,31.125 48.665,31.125 R.03
NetS1_03: S1.03 U3.30 | length 16
  Bottom Layer w0.5: U3.30 33.505,33.825 39.365,33.825 S1.03
NetS2_03: S2.03 U3.31 | length 10.9
  Bottom Layer w0.5: U3.31 32.6,35.46 S2.03
Netsocket1_01: socket1.01 U3.17 | length 14.8
  Top Layer w0.5: v1(6.825,18.175) 6.9,18.175 8.825,20.1 socket1.01
  Bottom Layer w0.5: U3.17 6.825,12.225 v1(6.825,18.175)
Netsocket1_02: socket1.02 U3.16 | length 14.9
  Top Layer w0.5: v1(6.175,20.325) 6.446,20.325 8.761,22.64 socket1.02
  Bottom Layer w0.5: U3.16 5.425,13.365 5.425,19.554 6.175,20.304 v1(6.175,20.325)
Netsocket1_03: socket1.03 U3.15 | length 15.4
  Top Layer w0.5: v1(6.5,24.025) 6.691,24.216 7.742,24.216 8.706,25.18 socket1.03
  Bottom Layer w0.5: U3.15 4.225,14.705 4.225,20.505 6.309,22.589 6.309,23.834 v1(6.5,24.025)
Netsocket2_01: socket2.01 U3.12 | length 12.4
  Top Layer w0.5: v1(6.575,28.716) 6.846,28.716 7.33,29.2 socket2.01
  Bottom Layer w0.5: U3.12 5.05,23.15 5.05,24.559 6.575,26.084 v1(6.575,28.716) ; socket2.01@8.609,29.009 socket2.01
Netsocket2_02: socket2.02 U3.11 | length 13
  Top Layer w0.5: v1(5.6,31.725) 5.615,31.74 socket2.02
  Bottom Layer w0.5: U3.11 2.791,23.431 2.791,23.941 5.025,26.175 5.025,29.65 5.6,30.225 v1(5.6,31.725) ; socket2.02@8.76,31.7 socket2.02
Netsocket2_03: socket2.03 U3.10 | length 13
  Top Layer w0.5: v1(5.505,34.28) socket2.03
  Bottom Layer w0.5: U3.10 4.05,27.23 4.05,32.825 v1(5.505,34.28)
NetU3_29: U3.29 Y.03 | length 21
  Bottom Layer w0.5: U3.29 28.205,25.78 35.35,32.925 42.465,32.925 Y.03
pads on no net: K1.4 U3.2 U3.4 U3.5 U3.6 U3.7 U3.8 U3.9 U3.13 U3.14 U3.18 U3.20 U3.21 U3.22 U3.23 U3.24 U3.25 U3.32 U3.33 U3.34 U3.35 U3.36 U3.37

## Other copper
Top Layer:
  text "HTWK" at 42.925,53.725 h2
  text "Leipzig" at 39.9,49.1 h2

## Silkscreen, mask and mechanical layers (free items; w line width, h text height)
Top Overlay:
  text "A" at 32.904,80.929 h1
  text "A" at 6.429,57.279 h1
  text "pwm" at 32.325,35.258 h1
  text "+" at 47.15,26.939 h2.52
  text "A" at 35.129,18.704 h1
Mechanical 1:
  circle w0.254: c52.5,3.5 r1.5
  circle w0.254: c52.5,61.5 r1.5
  lines w0.254: 34,46.5 cw(c35.5,46.5) 35.5,48 52.5,48 cw(c52.5,46.5) 54,46.5 cw(c52.5,46.5) 52.5,45 35.5,45 cw(c35.5,46.5) 34,46.5

## Text inside footprints (layer, text, board x,y; h text height)
RED1: Top Overlay "+" at 38.425,29 h1.5